# EAGLE board vr61 (EAGLE 9.6.2), part 1 of 2
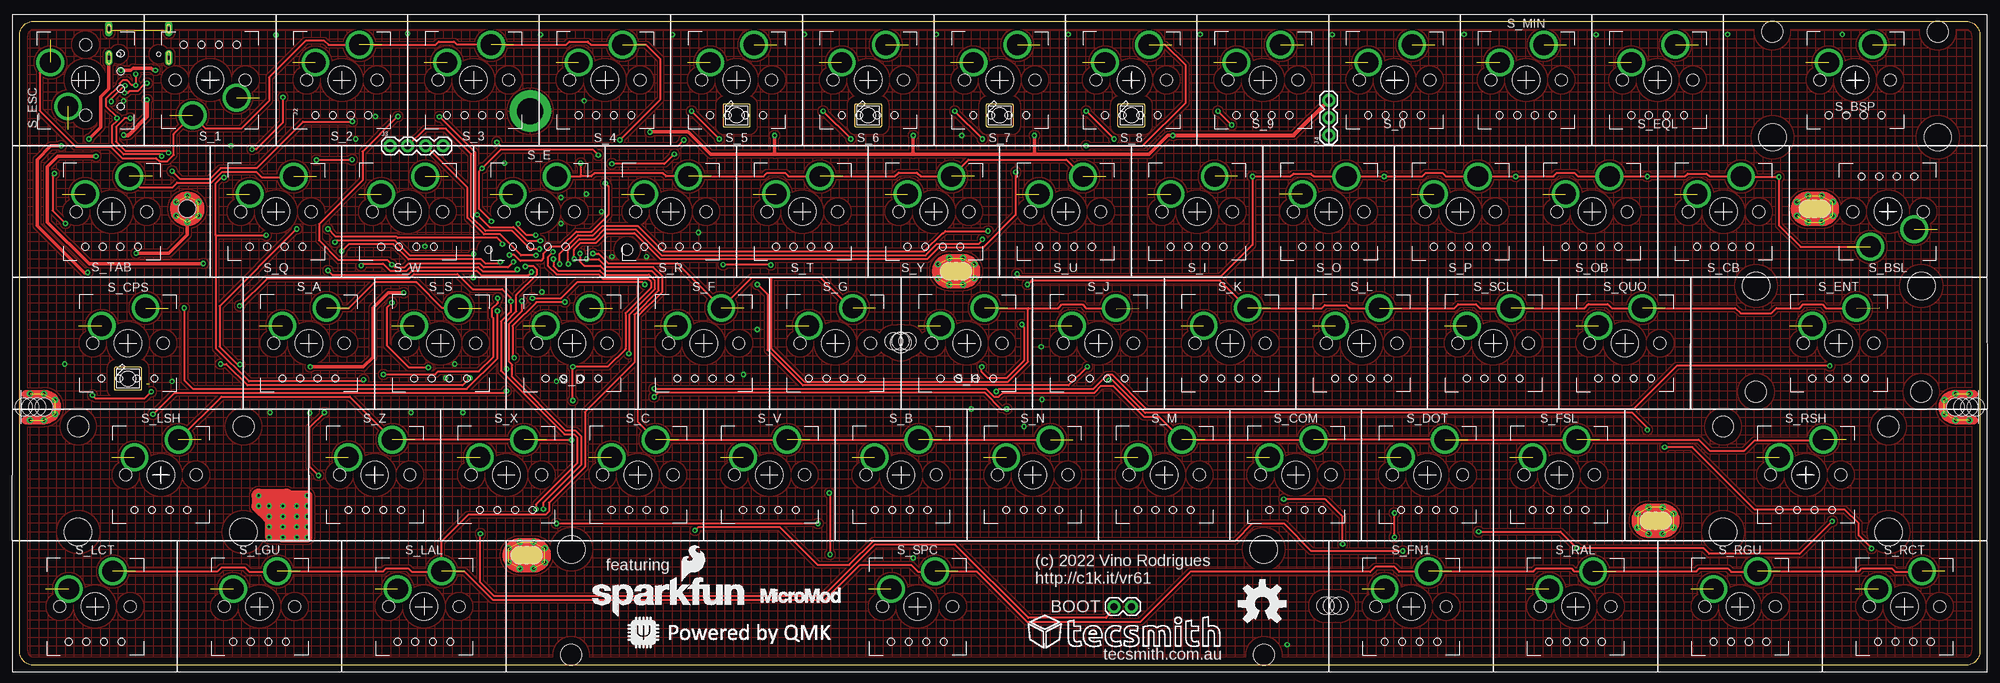
[diagram p0: board, top side]
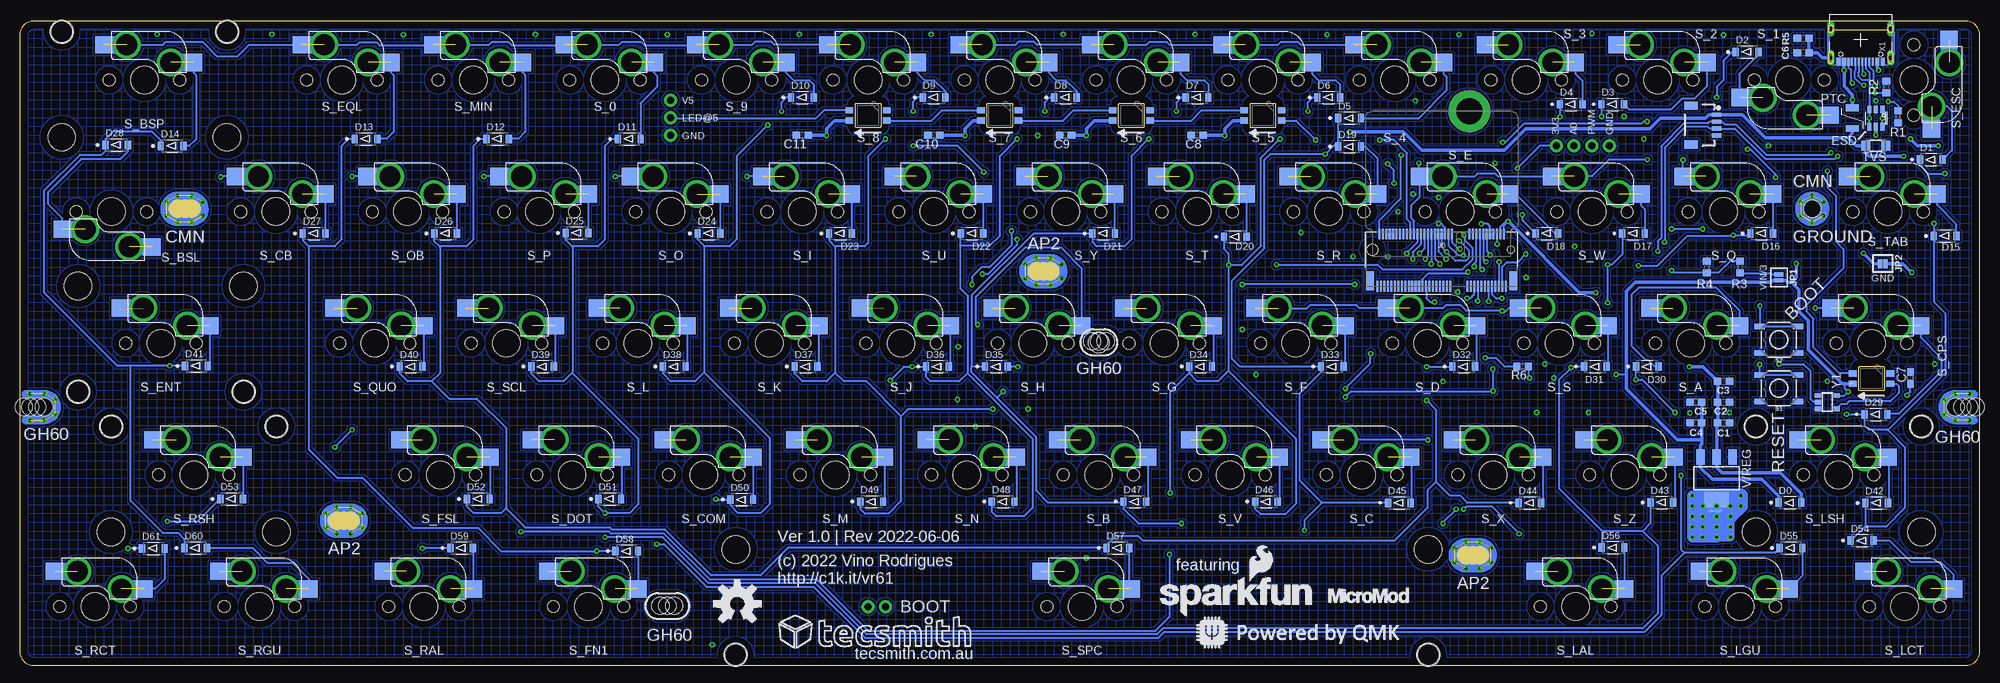
[diagram p1: board, bottom side, seen from below]

Size 283 x 93 mm. Coordinates in mm from the lower left corner, seen from the top.
Outline: 283,91 283,2 arc-90 281,0 2,0 arc-90 0,2 0,91 arc-90 2,93 281,93 arc-90 283,91
Copper layers (1*16): Top 0.035mm / dielectric 1.5mm / Bottom 0.035mm
Design rules "default *": minimum track width 10mil, minimum drill 0.35mm, track to track 10mil, track to pad 10mil, pad to pad 10mil, via to via 10mil, smd to smd 10mil, copper to edge 40mil, drill to drill 10mil, minimum pad ring 10mil, minimum via ring 8mil, stop-mask expansion 4mil, vias tented up to drill 0mil, thermal gap 10mil
Net classes: 0 default: width 0 mm, drill 0 mm
Holes 3 mm at 127.2,46.6
Holes 2.5 mm at 24.2,65.9 259.05,65.9 127.2,46.8 1.5,37.3 281.5,37.3 189.5,8.6 135.2,56.9 73.2,15.9 236.2,20.9 128.2,46.8 126.2,46.8 188.5,8.6 190.5,8.6

## Footprints (pad centres in the part's own frame; a part is rotated, then mirrored left to right if it is on the bottom)
MX-STABS-200U = hole 3.988: -11.938,8.255; 11.938,8.255 | hole 3.048: -11.938,-6.985; 11.938,-6.985
MX-STABS-625U = hole 3.988: -50,8.255; 50,8.255 | hole 3.048: -50,-6.985; 50,-6.985
0603 = smd 1.1 x 1: 1 -0.85,0; 2 0.85,0
C0603 = smd 1.1 x 1: 1 -0.85,0; 2 0.85,0
SOD-123 = smd 0.914 x 1.219: A 1.638,0; C -1.638,0
SOT-23-6L = smd 0.6 x 1.1: P$1 -0.95,-1.25; P$2 0,-1.25; P$3 0.95,-1.25; P$4 0.95,1.25; P$5 0,1.25; P$6 -0.95,1.25
STAND-OFF-REFLOW-M2.5 = drill 3.8 pad 6: 1 0,0
1X02 = drill 1.016 pad 1.88: 1 0,0; 2 2.54,0
1X04_1MM_RA = smd 0.6 x 1.35: 1 -1.5,0; 2 -0.5,0; 3 0.5,0; 4 1.5,0 | smd 1.2 x 2: NC1 2.8,-3.675; NC2 -2.8,-3.675
1X04 = drill 1.016 pad 1.88: 1 0,0; 2 2.54,0; 3 5.08,0; 4 7.62,0
1X03 = drill 1.016 pad 1.88: 1 0,0; 2 2.54,0; 3 5.08,0
M.2-CONNECTOR-E = smd 0.3 x 1.55: 1 9.25,-5.275; 2 9,2.275; 3 8.75,-5.275; 4 8.5,2.275; 5 8.25,-5.275; 6 8,2.275; 7 7.75,-5.275; 8 7.5,2.275; 9 7.25,-5.275; 10 7,2.275; 11 6.75,-5.275; 12 6.5,2.275; 13 6.25,-5.275; 14 6,2.275; 15 5.75,-5.275; 16 5.5,2.275; 17 5.25,-5.275; 18 5,2.275; 19 4.75,-5.275; 20 4.5,2.275; 21 4.25,-5.275; 22 4,2.275; 23 3.75,-5.275; 32 1.5,2.275; 33 1.25,-5.275; 34 1,2.275; 35 0.75,-5.275; 36 0.5,2.275; 37 0.25,-5.275; 38 0,2.275; 39 -0.25,-5.275; 40 -0.5,2.275; 41 -0.75,-5.275; 42 -1,2.275; 43 -1.25,-5.275; 44 -1.5,2.275; 45 -1.75,-5.275; 46 -2,2.275; 47 -2.25,-5.275; 48 -2.5,2.275; 49 -2.75,-5.275; 50 -3,2.275; 51 -3.25,-5.275; 52 -3.5,2.275; 53 -3.75,-5.275; 54 -4,2.275; 55 -4.25,-5.275; 56 -4.5,2.275; 57 -4.75,-5.275; 58 -5,2.275; 59 -5.25,-5.275; 60 -5.5,2.275; 61 -5.75,-5.275; 62 -6,2.275; 63 -6.25,-5.275; 64 -6.5,2.275; 65 -6.75,-5.275; 66 -7,2.275; 67 -7.25,-5.275; 68 -7.5,2.275; 69 -7.75,-5.275; 70 -8,2.275; 71 -8.25,-5.275; 72 -8.5,2.275; 73 -8.75,-5.275; 74 -9,2.275; 75 -9.25,-5.275 | smd 1.2 x 2.75: A1 10.35,-4.5; A2 -10.35,-4.5 | hole 1.1: 10,0 | hole 1.6: -10,0
SMT-JUMPER_2_NC_PASTE_NO-SILK = smd 0.635 x 1.27: 1 -0.406,0; 2 0.406,0
SMT-JUMPER_2_NO_NO-SILK = smd 0.635 x 1.27: 1 -0.406,0; 2 0.406,0
SK6812-E-MILL = smd 1.1 x 0.9 bottom: 1-VDD 2.7,-0.749; 2-DOUT 2.7,0.751; 3-GND -2.7,0.751; 4-DIN -2.7,-0.749
SOT223 = smd 1.219 x 2.235: 1 -2.311,-3.099; 2 0,-3.099; 3 2.311,-3.099 | smd 3.6 x 2.2: 4 0,3.099
SMD_PTC = smd 1 x 1.9: P$1 -1.5,0; P$2 1.5,0
R0603 = smd 1 x 1.1: 1 -0.85,0; 2 0.85,0
TACTILE_SWITCH_SMD_5.2MM = smd 1.524 x 0.762: 1 -2.794,1.905; 2 2.794,1.905; 3 -2.794,-1.905; 4 2.794,-1.905
MX-5-PIN-HOTSWAP-PAD = smd 2.55 x 2.5 bottom: P$1 -7.085,2.54; P$2 5.842,5.08 | drill 3 pad 3.75: P$3 -3.81,2.54; P$4 2.54,5.08 | hole 3.988: 0,0 | hole 1.75: -5.08,0; 5.08,0
MOUNTING-HOLE-WIDE = drill 0.4: P$2 -1,-1.9; P$3 -1,1.9; P$4 1,1.9; P$5 1,-1.9; P$7 2.6,-1; P$8 2.6,1; P$9 -2.6,1; P$10 -2.6,-1 | hole 2.5: -1,0; 1,0; 0,0
MOUNTING-HOLE = drill 0.4: P$2 0,-1.9; P$3 0,1.9; P$7 1.6,-1; P$8 1.6,1; P$9 -1.6,1; P$10 -1.6,-1 | hole 2.5: 0,0
MOUNTING-HOLE-VWIDE-C = drill 0.4: P$1 0,1.9; P$4 2,1.9; P$5 2,-1.9; P$6 0,-1.9; P$7 3.6,-1; P$8 3.6,1 | hole 2.5: 2,0; 0,0; 1,0; -0.9,0
SOD123FL-BI = smd 1.3 x 1.4: P$1 -1.45,0; P$2 1.45,0
TYPE-C-31-M-12 = smd 0.6 x 1.14: A1B12-GND -3.2,3.16; A4B9-VBUS -2.4,3.16; B1A12-GND 3.2,3.16; B4A9-VBUS 2.4,3.16 | smd 0.3 x 1.14: A5-CC1 -1.25,3.16; A6-DP1 -0.25,3.16; A7-DN1 0.25,3.16; A8-SBU1 1.25,3.16; B5-CC2 1.75,3.16; B6-DP2 0.75,3.16; B7-DN2 -0.75,3.16; B8-SBU2 -1.75,3.16 | drill 0.6 pad 1 long: M1 -4.32,2.59; M2 4.32,2.59; M3 -4.32,-1.59; M4 4.32,-1.59 | hole 0.6: 2.89,2.09; -2.89,2.09
SOT-23-5 = smd 0.69 x 0.99: 1 -0.95,-1.29; 2 0,-1.29; 3 0.95,-1.29; 4 0.95,1.3; 5 -0.95,1.3

## Placement (x,y rotation side)
B14  MX-STABS-200U  [MX-STABS-200U]  265,84.5 180 top
B41  MX-STABS-200U  [MX-STABS-200U]  262.62,46.5 0 top
B42  MX-STABS-200U  [MX-STABS-200U]  20.38,27.5 180 top
B53  MX-STABS-200U  [MX-STABS-200U]  257.88,27.5 180 top
B57  MX-STABS-625U  [MX-STABS-625U]  129.62,8.5 0 top
C1  100nF  [0603]  37,35 0 bottom
C2  22uF  [0603]  37,38 0 bottom
C3  4.7uF  [0603]  37,41 0 bottom
C4  100nF  [0603]  41,35 180 bottom
C5  22uF  [0603]  41,38 180 bottom
C6  4.7nF  [0603]  25.5,88.45 180 bottom
C7  100nF  [C0603]  10,41.5 90 bottom
C8  100nF  [C0603]  113,76.5 180 bottom
C9  100nF  [C0603]  132,76.5 180 bottom
C10  100nF  [C0603]  151,76.5 180 bottom
C11  100nF  [C0603]  170,76.5 180 bottom
D0  B5819W SL  [SOD-123]  27.4,23.5 0 bottom
D1  [SOD-123]  7,73 0 bottom
D2  [SOD-123]  33.6,88.55 0 bottom
D3  [SOD-123]  53,81 0 bottom
D4  [SOD-123]  59,81 0 bottom
D5  [SOD-123]  91,79 0 bottom
D6  [SOD-123]  94,82 0 bottom
D7  [SOD-123]  113,82 0 bottom
D8  [SOD-123]  132,82 0 bottom
D9  [SOD-123]  151,82 0 bottom
D10  [SOD-123]  170,82 0 bottom
D11  [SOD-123]  195,76 0 bottom
D12  [SOD-123]  214,76 0 bottom
D13  [SOD-123]  233,76 0 bottom
D14  [SOD-123]  261,75 0 bottom
D15  [SOD-123]  5,62 0 bottom
D16  [SOD-123]  31.5,62.38 0 bottom
D17  [SOD-123]  50,62.38 0 bottom
D18  [SOD-123]  62.5,62.38 0 bottom
D19  [SOD-123]  91,74.88 0 bottom
D20  [SOD-123]  107.5,61.88 0 bottom
D21  [SOD-123]  126.5,62.38 0 bottom
D22  [SOD-123]  145.5,62.38 0 bottom
D23  [SOD-123]  164.5,62.38 0 bottom
D24  [SOD-123]  183.5,62.38 0 bottom
D25  [SOD-123]  202.55,62.42 0 bottom
D26  [SOD-123]  221.5,62.38 0 bottom
D27  [SOD-123]  240.5,62.38 0 bottom
D28  [SOD-123]  269,75.12 0 bottom
D29  [SOD-123]  15,36.25 0 bottom
D30  [SOD-123]  48,43.12 0 bottom
D31  [SOD-123]  55.5,43.12 0 bottom
D32  [SOD-123]  74.5,43.12 0 bottom
D33  [SOD-123]  93.5,43.12 0 bottom
D34  [SOD-123]  112.5,43.12 0 bottom
D35  [SOD-123]  142,43.12 0 bottom
D36  [SOD-123]  150.5,43.12 0 bottom
D37  [SOD-123]  169.5,43.12 0 bottom
D38  [SOD-123]  188.5,43.12 0 bottom
D39  [SOD-123]  207.5,43.12 0 bottom
D40  [SOD-123]  226.5,43.12 0 bottom
D41  [SOD-123]  257.5,43.25 0 bottom
D42  [SOD-123]  14.9,23.45 0 bottom
D43  [SOD-123]  45.9,23.52 0 bottom
D44  [SOD-123]  64.95,23.48 0 bottom
D45  [SOD-123]  83.8,23.48 0 bottom
D46  [SOD-123]  103,23.62 0 bottom
D47  [SOD-123]  122,23.62 0 bottom
D48  [SOD-123]  141,23.62 0 bottom
D49  [SOD-123]  160,23.62 0 bottom
D50  [SOD-123]  178.75,23.93 0 bottom
D51  [SOD-123]  197.8,24.02 0 bottom
D52  [SOD-123]  216.8,24.02 0 bottom
D53  [SOD-123]  252.4,24.05 0 bottom
D54  [SOD-123]  17,18 0 bottom
D55  [SOD-123]  27.25,16.95 0 bottom
D56  [SOD-123]  52.95,17 0 bottom
D57  [SOD-123]  124.45,16.95 0 bottom
D58  [SOD-123]  195.35,16.5 0 bottom
D59  [SOD-123]  219.2,16.95 0 bottom
D60  [SOD-123]  257.6,16.95 0 bottom
D61  [SOD-123]  263.7,16.9 0 bottom
ESD  ESD_SRV05-4  [SOT-23-6L]  15,79 180 bottom
H5  STAND-OFF-REFLOW2.5MM_TALL  [STAND-OFF-REFLOW-M2.5]  73.7,80 0 top
J1  [1X02]  158,8.5 0 top
J2  SM04B-SRSS-TB(LF)(SN)  [1X04_1MM_RA]  38,78 270 bottom
J3  [1X04]  53.5,75 0 top
J4  [1X03]  189,76.5 90 top
J6  MICROMOD-2222-C  [M.2-CONNECTOR-E]  77.7,60 0 bottom
JP1  OPT  [SMT-JUMPER_2_NC_PASTE_NO-SILK]  29,56 270 bottom
JP2  G-OPT  [SMT-JUMPER_2_NO_NO-SILK]  14,58 180 bottom
LED-5  SK6812-E-REVERSE  [SK6812-E-MILL]  103.5,79.4 0 top
LED-6  SK6812-E-REVERSE  [SK6812-E-MILL]  122.5,79.4 0 top
LED-7  SK6812-E-REVERSE  [SK6812-E-MILL]  141.5,79.4 0 top
LED-8  SK6812-E-REVERSE  [SK6812-E-MILL]  160.5,79.4 0 top
LED-CL  SK6812-E-REVERSE  [SK6812-E-MILL]  15.62,41.4 0 top
LM1117  AMS1117-3.3  [SOT223]  38,27 180 bottom
LOGO1  OSHW-LOGOL  [OSHW-LOGO-L]  179.4,8.9 0 top
LOGO2  OSHW-LOGOL  [OSHW-LOGO-L]  179.4,8.9 0 bottom
PTC  PTC_ASMD1206-150  [SMD_PTC]  18.4,79 270 bottom
R1  5.1K  [R0603]  11.8,79.2 270 bottom
R2  5.1K  [R0603]  13.5,83.5 90 bottom
R3  150K  [R0603]  34.6,57.5 270 bottom
R4  75K  [R0603]  39.4,57.5 270 bottom
R5  1000K  [0603]  25.5,90.5 0 bottom
R6  220  [R0603]  66,43.15 180 bottom
S1  Reset  [TACTILE_SWITCH_SMD_5.2MM]  29,40 180 bottom
S2  BOOT  [TACTILE_SWITCH_SMD_5.2MM]  29,47 180 bottom
S_0  MX-5-PIN-HOTSWAP-PAD  [MX-5-PIN-HOTSWAP-PAD]  198.5,84.5 0 top
S_1  MX-5-PIN-HOTSWAP-PAD  [MX-5-PIN-HOTSWAP-PAD]  27.5,84.5 180 top
S_2  MX-5-PIN-HOTSWAP-PAD  [MX-5-PIN-HOTSWAP-PAD]  46.5,84.5 0 top
S_3  MX-5-PIN-HOTSWAP-PAD  [MX-5-PIN-HOTSWAP-PAD]  65.5,84.5 0 top
S_4  MX-5-PIN-HOTSWAP-PAD  [MX-5-PIN-HOTSWAP-PAD]  84.5,84.5 0 top
S_5  MX-5-PIN-HOTSWAP-PAD  [MX-5-PIN-HOTSWAP-PAD]  103.5,84.5 0 top
S_6  MX-5-PIN-HOTSWAP-PAD  [MX-5-PIN-HOTSWAP-PAD]  122.5,84.5 0 top
S_7  MX-5-PIN-HOTSWAP-PAD  [MX-5-PIN-HOTSWAP-PAD]  141.5,84.5 0 top
S_8  MX-5-PIN-HOTSWAP-PAD  [MX-5-PIN-HOTSWAP-PAD]  160.5,84.5 0 top
S_9  MX-5-PIN-HOTSWAP-PAD  [MX-5-PIN-HOTSWAP-PAD]  179.5,84.5 0 top
S_A  MX-5-PIN-HOTSWAP-PAD  [MX-5-PIN-HOTSWAP-PAD]  41.75,46.5 0 top
S_B  MX-5-PIN-HOTSWAP-PAD  [MX-5-PIN-HOTSWAP-PAD]  127.25,27.5 0 top
S_BSL  MX-5-PIN-HOTSWAP-PAD  [MX-5-PIN-HOTSWAP-PAD]  269.75,65.5 180 top
S_BSP  MX-5-PIN-HOTSWAP-PAD  [MX-5-PIN-HOTSWAP-PAD]  265,84.5 0 top
S_C  MX-5-PIN-HOTSWAP-PAD  [MX-5-PIN-HOTSWAP-PAD]  89.25,27.5 0 top
S_CB  MX-5-PIN-HOTSWAP-PAD  [MX-5-PIN-HOTSWAP-PAD]  246,65.5 0 top
S_COM  MX-5-PIN-HOTSWAP-PAD  [MX-5-PIN-HOTSWAP-PAD]  184.25,27.5 0 top
S_CPS  MX-5-PIN-HOTSWAP-PAD  [MX-5-PIN-HOTSWAP-PAD]  15.62,46.5 0 top
S_D  MX-5-PIN-HOTSWAP-PAD  [MX-5-PIN-HOTSWAP-PAD]  79.75,46.5 0 top
S_DOT  MX-5-PIN-HOTSWAP-PAD  [MX-5-PIN-HOTSWAP-PAD]  203.25,27.5 0 top
S_E  MX-5-PIN-HOTSWAP-PAD  [MX-5-PIN-HOTSWAP-PAD]  75,65.5 0 top
S_ENT  MX-5-PIN-HOTSWAP-PAD  [MX-5-PIN-HOTSWAP-PAD]  262.62,46.5 0 top
S_EQL  MX-5-PIN-HOTSWAP-PAD  [MX-5-PIN-HOTSWAP-PAD]  236.5,84.5 0 top
S_ESC  MX-5-PIN-HOTSWAP-PAD  [MX-5-PIN-HOTSWAP-PAD]  9.5,84.5 90 top
S_F  MX-5-PIN-HOTSWAP-PAD  [MX-5-PIN-HOTSWAP-PAD]  98.75,46.5 0 top
S_FN1  MX-5-PIN-HOTSWAP-PAD  [MX-5-PIN-HOTSWAP-PAD]  200.88,8.5 0 top
S_FSL  MX-5-PIN-HOTSWAP-PAD  [MX-5-PIN-HOTSWAP-PAD]  222.25,27.5 0 top
S_G  MX-5-PIN-HOTSWAP-PAD  [MX-5-PIN-HOTSWAP-PAD]  117.75,46.5 0 top
S_H  MX-5-PIN-HOTSWAP-PAD  [MX-5-PIN-HOTSWAP-PAD]  136.75,46.5 0 top
S_I  MX-5-PIN-HOTSWAP-PAD  [MX-5-PIN-HOTSWAP-PAD]  170,65.5 0 top
S_J  MX-5-PIN-HOTSWAP-PAD  [MX-5-PIN-HOTSWAP-PAD]  155.75,46.5 0 top
S_K  MX-5-PIN-HOTSWAP-PAD  [MX-5-PIN-HOTSWAP-PAD]  174.75,46.5 0 top
S_L  MX-5-PIN-HOTSWAP-PAD  [MX-5-PIN-HOTSWAP-PAD]  193.75,46.5 0 top
S_LAL  MX-5-PIN-HOTSWAP-PAD  [MX-5-PIN-HOTSWAP-PAD]  58.38,8.5 0 top
S_LCT  MX-5-PIN-HOTSWAP-PAD  [MX-5-PIN-HOTSWAP-PAD]  10.88,8.5 0 top
S_LGU  MX-5-PIN-HOTSWAP-PAD  [MX-5-PIN-HOTSWAP-PAD]  34.62,8.5 0 top
S_LSH  MX-5-PIN-HOTSWAP-PAD  [MX-5-PIN-HOTSWAP-PAD]  20.38,27.5 0 top
S_M  MX-5-PIN-HOTSWAP-PAD  [MX-5-PIN-HOTSWAP-PAD]  165.25,27.5 0 top
S_MIN  MX-5-PIN-HOTSWAP-PAD  [MX-5-PIN-HOTSWAP-PAD]  217.5,84.5 0 top
S_N  MX-5-PIN-HOTSWAP-PAD  [MX-5-PIN-HOTSWAP-PAD]  146.25,27.5 0 top
S_O  MX-5-PIN-HOTSWAP-PAD  [MX-5-PIN-HOTSWAP-PAD]  189,65.5 0 top
S_OB  MX-5-PIN-HOTSWAP-PAD  [MX-5-PIN-HOTSWAP-PAD]  227,65.5 0 top
S_P  MX-5-PIN-HOTSWAP-PAD  [MX-5-PIN-HOTSWAP-PAD]  208,65.5 0 top
S_Q  MX-5-PIN-HOTSWAP-PAD  [MX-5-PIN-HOTSWAP-PAD]  37,65.5 0 top
S_QUO  MX-5-PIN-HOTSWAP-PAD  [MX-5-PIN-HOTSWAP-PAD]  231.75,46.5 0 top
S_R  MX-5-PIN-HOTSWAP-PAD  [MX-5-PIN-HOTSWAP-PAD]  94,65.5 0 top
S_RAL  MX-5-PIN-HOTSWAP-PAD  [MX-5-PIN-HOTSWAP-PAD]  224.62,8.5 0 top
S_RCT  MX-5-PIN-HOTSWAP-PAD  [MX-5-PIN-HOTSWAP-PAD]  272.12,8.5 0 top
S_RGU  MX-5-PIN-HOTSWAP-PAD  [MX-5-PIN-HOTSWAP-PAD]  248.38,8.5 0 top
S_RSH  MX-5-PIN-HOTSWAP-PAD  [MX-5-PIN-HOTSWAP-PAD]  257.88,27.5 0 top
S_S  MX-5-PIN-HOTSWAP-PAD  [MX-5-PIN-HOTSWAP-PAD]  60.75,46.5 0 top
S_SCL  MX-5-PIN-HOTSWAP-PAD  [MX-5-PIN-HOTSWAP-PAD]  212.75,46.5 0 top
S_SPC  MX-5-PIN-HOTSWAP-PAD  [MX-5-PIN-HOTSWAP-PAD]  129.62,8.5 0 top
S_T  MX-5-PIN-HOTSWAP-PAD  [MX-5-PIN-HOTSWAP-PAD]  113,65.5 0 top
S_TAB  MX-5-PIN-HOTSWAP-PAD  [MX-5-PIN-HOTSWAP-PAD]  13.25,65.5 0 top
S_U  MX-5-PIN-HOTSWAP-PAD  [MX-5-PIN-HOTSWAP-PAD]  151,65.5 0 top
S_V  MX-5-PIN-HOTSWAP-PAD  [MX-5-PIN-HOTSWAP-PAD]  108.25,27.5 0 top
S_W  MX-5-PIN-HOTSWAP-PAD  [MX-5-PIN-HOTSWAP-PAD]  56,65.5 0 top
S_X  MX-5-PIN-HOTSWAP-PAD  [MX-5-PIN-HOTSWAP-PAD]  70.25,27.5 0 top
S_Y  MX-5-PIN-HOTSWAP-PAD  [MX-5-PIN-HOTSWAP-PAD]  132,65.5 0 top
S_Z  MX-5-PIN-HOTSWAP-PAD  [MX-5-PIN-HOTSWAP-PAD]  51.25,27.5 0 top
SA1  MOUNTING-HOLE-WIDE  [MOUNTING-HOLE-WIDE]  73.2,15.9 0 top
SA2  MOUNTING-HOLE-WIDE  [MOUNTING-HOLE-WIDE]  135.2,56.9 0 top
SA3  MOUNTING-HOLE-WIDE  [MOUNTING-HOLE-WIDE]  236.2,20.9 0 top
SC1  MOUNTING-HOLE  [MOUNTING-HOLE]  24.2,65.9 0 top
SC2  MOUNTING-HOLE-WIDE  [MOUNTING-HOLE-WIDE]  259.2,65.9 0 top
SG1  MOUNTING-HOLE-VWIDEEDGE-CUT  [MOUNTING-HOLE-VWIDE-C]  1.5,37.3 0 top
SG4  MOUNTING-HOLE-VWIDEEDGE-CUT  [MOUNTING-HOLE-VWIDE-C]  281.5,37.3 180 top
TVS  TVS_SMF9.0CA  [SOD123FL-BI]  15,75 0 bottom
U$3  MICROMOD-LOGO  [MICROMOD-LOGO]  107,9 0 top
U$5  SPARKFUN_LOGO0.2  [SFE_LOGO_NAME_FLAME_.2]  82,7 0 top
U$6  QMK_LOGO  [QMK_LOGO]  87.7,2.4 0 top
U$7  TECSMITH-LOGOLONG  [TECSMITH-NAME]  171,5 0 bottom
U$8  TECSMITH-LOGOLONG  [TECSMITH-NAME]  148,5 0 top
U$10  SPARKFUN_LOGO0.2  [SFE_LOGO_NAME_FLAME_.2]  119,7 0 bottom
U$12  QMK_LOGO  [QMK_LOGO]  113.2,2.4 0 bottom
U$13  MICROMOD-LOGO  [MICROMOD-LOGO]  94,9 0 bottom
X1  TYPE-C-31-M-12  [TYPE-C-31-M-12]  17.2,90.3 180 bottom
Y1  74AHCT1G125  [SOT-23-5]  22,38 270 bottom
Z1  MX-FPRINT-100U19  [MX-FPRINT-1900-100U]  8.5,84.5 90 top
Z2  MX-FPRINT-100U19  [MX-FPRINT-1900-100U]  27.5,84.5 90 top
Z3  MX-FPRINT-100U19  [MX-FPRINT-1900-100U]  46.5,84.5 0 top
Z4  MX-FPRINT-100U19  [MX-FPRINT-1900-100U]  65.5,84.5 0 top
Z5  MX-FPRINT-100U19  [MX-FPRINT-1900-100U]  84.5,84.5 0 top
Z6  MX-FPRINT-100U19  [MX-FPRINT-1900-100U]  103.5,84.5 0 top
Z7  MX-FPRINT-100U19  [MX-FPRINT-1900-100U]  122.5,84.5 0 top
Z8  MX-FPRINT-100U19  [MX-FPRINT-1900-100U]  141.5,84.5 0 top
Z9  MX-FPRINT-100U19  [MX-FPRINT-1900-100U]  160.5,84.5 90 top
Z10  MX-FPRINT-100U19  [MX-FPRINT-1900-100U]  179.5,84.5 0 top
Z11  MX-FPRINT-100U19  [MX-FPRINT-1900-100U]  198.5,84.5 270 top
Z12  MX-FPRINT-100U19  [MX-FPRINT-1900-100U]  217.5,84.5 0 top
Z13  MX-FPRINT-100U19  [MX-FPRINT-1900-100U]  236.5,84.5 0 top
Z14  MX-FPRINT-200U19  [MX-FPRINT-1900-200U]  265,84.5 0 top
Z15  MX-FPRINT-150U19  [MX-FPRINT-1900-150U]  13.25,65.5 0 top
Z16  MX-FPRINT-100U19  [MX-FPRINT-1900-100U]  37,65.5 0 top
Z17  MX-FPRINT-100U19  [MX-FPRINT-1900-100U]  56,65.5 0 top
Z18  MX-FPRINT-100U19  [MX-FPRINT-1900-100U]  75,65.5 90 top
Z19  MX-FPRINT-100U19  [MX-FPRINT-1900-100U]  94,65.5 0 top
Z20  MX-FPRINT-100U19  [MX-FPRINT-1900-100U]  113,65.5 0 top
Z21  MX-FPRINT-100U19  [MX-FPRINT-1900-100U]  132,65.5 0 top
Z22  MX-FPRINT-100U19  [MX-FPRINT-1900-100U]  151,65.5 0 top
Z23  MX-FPRINT-100U19  [MX-FPRINT-1900-100U]  170,65.5 0 top
Z24  MX-FPRINT-100U19  [MX-FPRINT-1900-100U]  189,65.5 0 top
Z25  MX-FPRINT-100U19  [MX-FPRINT-1900-100U]  208,65.5 0 top
Z26  MX-FPRINT-100U19  [MX-FPRINT-1900-100U]  227,65.5 0 top
Z27  MX-FPRINT-100U19  [MX-FPRINT-1900-100U]  246,65.5 0 top
Z28  MX-FPRINT-150U19  [MX-FPRINT-1900-150U]  269.75,65.5 0 top
Z29  MX-FPRINT-175U19  [MX-FPRINT-1900-175U]  15.62,46.5 0 top
Z30  MX-FPRINT-100U19  [MX-FPRINT-1900-100U]  41.75,46.5 0 top
Z31  MX-FPRINT-100U19  [MX-FPRINT-1900-100U]  60.75,46.5 0 top
Z32  MX-FPRINT-100U19  [MX-FPRINT-1900-100U]  79.75,46.5 0 top
Z33  MX-FPRINT-100U19  [MX-FPRINT-1900-100U]  98.75,46.5 0 top
Z34  MX-FPRINT-100U19  [MX-FPRINT-1900-100U]  117.75,46.5 0 top
Z35  MX-FPRINT-100U19  [MX-FPRINT-1900-100U]  136.75,46.5 0 top
Z36  MX-FPRINT-100U19  [MX-FPRINT-1900-100U]  155.75,46.5 0 top
Z37  MX-FPRINT-100U19  [MX-FPRINT-1900-100U]  174.75,46.5 0 top
Z38  MX-FPRINT-100U19  [MX-FPRINT-1900-100U]  193.75,46.5 0 top
Z39  MX-FPRINT-100U19  [MX-FPRINT-1900-100U]  212.75,46.5 0 top
Z40  MX-FPRINT-100U19  [MX-FPRINT-1900-100U]  231.75,46.5 0 top
Z41  MX-FPRINT-225U19  [MX-FPRINT-1900-225U]  262.62,46.5 0 top
Z42  MX-FPRINT-225U19  [MX-FPRINT-1900-225U]  20.38,27.5 0 top
Z43  MX-FPRINT-100U19  [MX-FPRINT-1900-100U]  51.25,27.5 90 top
Z44  MX-FPRINT-100U19  [MX-FPRINT-1900-100U]  70.25,27.5 0 top
Z45  MX-FPRINT-100U19  [MX-FPRINT-1900-100U]  89.25,27.5 0 top
Z46  MX-FPRINT-100U19  [MX-FPRINT-1900-100U]  108.25,27.5 0 top
Z47  MX-FPRINT-100U19  [MX-FPRINT-1900-100U]  127.25,27.5 0 top
Z48  MX-FPRINT-100U19  [MX-FPRINT-1900-100U]  146.25,27.5 0 top
Z49  MX-FPRINT-100U19  [MX-FPRINT-1900-100U]  165.25,27.5 0 top
Z50  MX-FPRINT-100U19  [MX-FPRINT-1900-100U]  184.25,27.5 0 top
Z51  MX-FPRINT-100U19  [MX-FPRINT-1900-100U]  203.25,27.5 0 top
Z52  MX-FPRINT-100U19  [MX-FPRINT-1900-100U]  222.25,27.5 0 top
Z53  MX-FPRINT-275U19  [MX-FPRINT-1900-275U]  257.88,27.5 0 top
Z54  MX-FPRINT-125U19  [MX-FPRINT-1900-125U]  10.88,8.5 0 top
Z55  MX-FPRINT-125U19  [MX-FPRINT-1900-125U]  34.62,8.5 0 top
Z56  MX-FPRINT-125U19  [MX-FPRINT-1900-125U]  58.38,8.5 0 top
Z57  MX-FPRINT-625U19  [MX-FPRINT-1900-625U]  129.62,8.5 0 top
Z58  MX-FPRINT-125U19  [MX-FPRINT-1900-125U]  200.88,8.5 0 top
Z59  MX-FPRINT-125U19  [MX-FPRINT-1900-125U]  224.62,8.5 0 top
Z60  MX-FPRINT-125U19  [MX-FPRINT-1900-125U]  248.38,8.5 0 top
Z61  MX-FPRINT-125U19  [MX-FPRINT-1900-125U]  272.12,8.5 0 top

## Library data of the parts
B14 B41 B42 B53 B57 ESD LED-5-LED-8 LED-CL PTC S_0 S_1-S_9 S_A S_B S_BSL S_BSP S_C S_CB S_COM S_CPS S_D S_DOT S_E S_ENT S_EQL S_ESC S_F S_FN1 S_FSL S_G S_H S_I S_J S_K S_L S_LAL S_LCT S_LGU S_LSH S_M S_MIN S_N S_O S_OB S_P S_Q S_QUO S_R S_RAL S_RCT S_RGU S_RSH S_S S_SCL S_SPC S_T S_TAB S_U S_V S_W S_X S_Y S_Z SA1-SA3 SC1 SC2 SG1 SG4 TVS X1 Y1 Z1-Z61 = ts_keyboards
C1 C4 C6 = SparkFun-Capacitors; PROD_ID: CAP-08604
C2 C5 = SparkFun-Capacitors; PROD_ID: CAP-07822
C3 = SparkFun-Capacitors; PROD_ID: CAP-07886
C7-C11 = rcl; SPICEPREFIX: C
D0 D1-D61 = jlcpcb_basic_parts
H5 = SparkFun-Hardware; PROD_ID: HW-14899
J1 J4 = SparkFun-Connectors
J2 = __untitled
J3 = SparkFun-Connectors; PROD_ID: CONN-09696
J6 = SparkFun-MicroMod; PROD_ID: CONN-14877
JP1 JP2 = SparkFun-Jumpers
LM1117 = SparkFun-IC-Power; PROD_ID: VREG-08170
LOGO1 LOGO2 U$3 U$5-U$8 U$10 U$12 U$13 = random_logos
R1-R4 R6 = rcl; SPICEPREFIX: R
R5 = SparkFun-Resistors; PROD_ID: RES-09737
S1 S2 = SparkFun-Switches; PROD_ID: SWCH-14139

## Nets
!BOOT: J1.1 J6.11 S2.3 S2.4
!RESET: J6.6 S1.3 S1.4
A0: J3.3 J6.34
CC1: R1.1 X1.A5-CC1
CC2: R2.1 X1.B5-CC2
D+: ESD.P$1 ESD.P$6 J2.3 J6.3 X1.A6-DP1 X1.B6-DP2
D-: ESD.P$3 ESD.P$4 J2.2 J6.5 X1.A7-DN1 X1.B7-DN2
GND: C1.2 C2.2 C3.2 C4.2 C5.2 C6.2 C7.2 C8.2 C9.2 C10.2 C11.2 ESD.P$2 H5.1 J1.2 J2.4 J3.1 J4.1 J6.1 J6.7 J6.33 J6.36 J6.39 J6.45 J6.75 LED-5.3-GND LED-6.3-GND LED-7.3-GND LED-8.3-GND LED-CL.3-GND LM1117.1 R1.2 R2.2 R4.1 R5.1 S1.1 S1.2 S2.1 S2.2 TVS.P$2 X1.A1B12-GND X1.B1A12-GND Y1.1 Y1.3
GROUND: C6.1 JP2.1 R5.2 X1.M1 X1.M2 X1.M3 X1.M4
LED: J6.47 R6.2
LED1ST: R6.1 Y1.2
MX0: D1.C D9.C D15.C D23.C D29.C D37.C D42.C D49.C D54.C J6.18
MX1: D2.C D10.C D16.C D24.C D30.C D38.C D50.C D55.C J6.16
MX2: D3.C D11.C D17.C D25.C D31.C D39.C D43.C D51.C D56.C J6.14
MX3: D4.C D12.C D18.C D26.C D32.C D40.C D44.C D52.C D57.C J6.38
MX4: D5.C D13.C D19.C D27.C D33.C D45.C D58.C J6.12
MX5: D6.C D20.C D34.C D46.C D53.C D59.C J6.10
MX6: D7.C D14.C D21.C D28.C D35.C D41.C D47.C D60.C J6.17
MX7: D8.C D22.C D36.C D48.C D61.C J6.19
MY0: J6.56 S_1.P$2 S_1.P$4 S_2.P$2 S_2.P$4 S_3.P$2 S_3.P$4 S_4.P$2 S_4.P$4 S_5.P$2 S_5.P$4 S_6.P$2 S_6.P$4 S_7.P$2 S_7.P$4 S_ESC.P$2 S_ESC.P$4
MY1: J6.54 S_E.P$2 S_E.P$4 S_Q.P$2 S_Q.P$4 S_R.P$2 S_R.P$4 S_T.P$2 S_T.P$4 S_TAB.P$2 S_TAB.P$4 S_U.P$2 S_U.P$4 S_W.P$2 S_W.P$4 S_Y.P$2 S_Y.P$4
MY2: J6.52 S_A.P$2 S_A.P$4 S_CPS.P$2 S_CPS.P$4 S_D.P$2 S_D.P$4 S_F.P$2 S_F.P$4 S_G.P$2 S_G.P$4 S_H.P$2 S_H.P$4 S_J.P$2 S_J.P$4 S_S.P$2 S_S.P$4
MY3: J6.50 S_B.P$2 S_B.P$4 S_C.P$2 S_C.P$4 S_LSH.P$2 S_LSH.P$4 S_N.P$2 S_N.P$4 S_V.P$2 S_V.P$4 S_X.P$2 S_X.P$4 S_Z.P$2 S_Z.P$4
MY4: J6.48 S_FN1.P$2 S_FN1.P$4 S_LAL.P$2 S_LAL.P$4 S_LCT.P$2 S_LCT.P$4 S_LGU.P$2 S_LGU.P$4 S_RAL.P$2 S_RAL.P$4 S_RCT.P$2 S_RCT.P$4 S_RGU.P$2 S_RGU.P$4 S_SPC.P$2 S_SPC.P$4
MY5: J6.46 S_0.P$2 S_0.P$4 S_8.P$2 S_8.P$4 S_9.P$2 S_9.P$4 S_BSP.P$2 S_BSP.P$4 S_EQL.P$2 S_EQL.P$4 S_MIN.P$2 S_MIN.P$4
MY6: J6.44 S_BSL.P$2 S_BSL.P$4 S_CB.P$2 S_CB.P$4 S_I.P$2 S_I.P$4 S_O.P$2 S_O.P$4 S_OB.P$2 S_OB.P$4 S_P.P$2 S_P.P$4
MY7: J6.42 S_ENT.P$2 S_ENT.P$4 S_K.P$2 S_K.P$4 S_L.P$2 S_L.P$4 S_QUO.P$2 S_QUO.P$4 S_SCL.P$2 S_SCL.P$4
MY8: J6.40 S_COM.P$2 S_COM.P$4 S_DOT.P$2 S_DOT.P$4 S_FSL.P$2 S_FSL.P$4 S_M.P$2 S_M.P$4 S_RSH.P$2 S_RSH.P$4
N$1: D1.A S_ESC.P$1 S_ESC.P$3
N$2: D2.A S_1.P$1 S_1.P$3
N$3: D3.A S_2.P$1 S_2.P$3
N$4: D4.A S_3.P$1 S_3.P$3
N$5: D5.A S_4.P$1 S_4.P$3
N$6: D6.A S_5.P$1 S_5.P$3
N$7: D7.A S_6.P$1 S_6.P$3
N$8: D8.A S_7.P$1 S_7.P$3
N$9: D9.A S_8.P$1 S_8.P$3
N$10: D10.A S_9.P$1 S_9.P$3
N$11: D11.A S_0.P$1 S_0.P$3
N$12: D12.A S_MIN.P$1 S_MIN.P$3
N$13: D13.A S_EQL.P$1 S_EQL.P$3
N$14: D14.A S_BSP.P$1 S_BSP.P$3
N$15: D15.A S_TAB.P$1 S_TAB.P$3
N$16: D16.A S_Q.P$1 S_Q.P$3
N$17: D17.A S_W.P$1 S_W.P$3
N$18: D18.A S_E.P$1 S_E.P$3
N$19: D19.A S_R.P$1 S_R.P$3
N$20: D20.A S_T.P$1 S_T.P$3
N$21: D21.A S_Y.P$1 S_Y.P$3
N$22: D22.A S_U.P$1 S_U.P$3
N$23: D23.A S_I.P$1 S_I.P$3
N$24: D24.A S_O.P$1 S_O.P$3
N$25: D25.A S_P.P$1 S_P.P$3
N$26: D26.A S_OB.P$1 S_OB.P$3
N$27: D27.A S_CB.P$1 S_CB.P$3
N$28: D28.A S_BSL.P$1 S_BSL.P$3
N$29: LED-5.4-DIN LED-CL.2-DOUT
N$30: D30.A S_A.P$1 S_A.P$3
N$31: D31.A S_S.P$1 S_S.P$3
N$32: D32.A S_D.P$1 S_D.P$3
N$33: D33.A S_F.P$1 S_F.P$3
N$34: D34.A S_G.P$1 S_G.P$3
N$35: D35.A S_H.P$1 S_H.P$3
N$36: D36.A S_J.P$1 S_J.P$3
N$37: D37.A S_K.P$1 S_K.P$3
N$38: D38.A S_L.P$1 S_L.P$3
N$39: D39.A S_SCL.P$1 S_SCL.P$3
N$40: D40.A S_QUO.P$1 S_QUO.P$3
N$41: D41.A S_ENT.P$1 S_ENT.P$3
N$42: D42.A S_LSH.P$1 S_LSH.P$3
N$43: D43.A S_Z.P$1 S_Z.P$3
N$44: D44.A S_X.P$1 S_X.P$3
N$45: D45.A S_C.P$1 S_C.P$3
N$46: D46.A S_V.P$1 S_V.P$3
N$47: D47.A S_B.P$1 S_B.P$3
N$48: D48.A S_N.P$1 S_N.P$3
N$49: D49.A S_M.P$1 S_M.P$3
N$50: D50.A S_COM.P$1 S_COM.P$3
N$51: D51.A S_DOT.P$1 S_DOT.P$3
N$52: D52.A S_FSL.P$1 S_FSL.P$3
N$53: D53.A S_RSH.P$1 S_RSH.P$3
N$54: D54.A S_LCT.P$1 S_LCT.P$3
N$55: D55.A S_LGU.P$1 S_LGU.P$3
N$56: D56.A S_LAL.P$1 S_LAL.P$3
N$57: D57.A S_SPC.P$1 S_SPC.P$3
N$58: D58.A S_FN1.P$1 S_FN1.P$3
N$59: D59.A S_RAL.P$1 S_RAL.P$3
N$60: D60.A S_RGU.P$1 S_RGU.P$3
N$61: D61.A S_RCT.P$1 S_RCT.P$3
N$62: D29.A S_CPS.P$1 S_CPS.P$3
N$63: LED-5.2-DOUT LED-6.4-DIN
N$64: LED-6.2-DOUT LED-7.4-DIN
N$65: LED-7.2-DOUT LED-8.4-DIN
N$68: JP1.1 R3.2
N$70: LED-CL.4-DIN Y1.4
N$72: J4.2 LED-8.2-DOUT
PWM: J3.2 J6.32
SA1: SA1.P$2 SA1.P$3 SA1.P$4 SA1.P$5 SA1.P$7 SA1.P$8 SA1.P$9 SA1.P$10
SA2: SA2.P$2 SA2.P$3 SA2.P$4 SA2.P$5 SA2.P$7 SA2.P$8 SA2.P$9 SA2.P$10
SA3: SA3.P$2 SA3.P$3 SA3.P$4 SA3.P$5 SA3.P$7 SA3.P$8 SA3.P$9 SA3.P$10
SC1: JP2.2 SC1.P$2 SC1.P$3 SC1.P$7 SC1.P$8 SC1.P$9 SC1.P$10
SC2: SC2.P$2 SC2.P$3 SC2.P$4 SC2.P$5 SC2.P$7 SC2.P$8 SC2.P$9 SC2.P$10
SG1: SG1.P$1 SG1.P$4 SG1.P$5 SG1.P$6 SG1.P$7 SG1.P$8
SG4: SG4.P$1 SG4.P$4 SG4.P$5 SG4.P$6 SG4.P$7 SG4.P$8
SINK: LM1117.4
SWDCK: J6.21
SWDIO: J6.23
VBUS: ESD.P$5 PTC.P$1 X1.A4B9-VBUS X1.B4A9-VBUS
VCC: C1.1 C2.1 C3.1 D0.A J3.4 J6.2 J6.4 J6.74 LM1117.2
VIN/3: J6.49 R3.1 R4.2
VSUP: C4.1 C5.1 C7.1 C8.1 C9.1 C10.1 C11.1 D0.C J2.1 J4.3 J6.9 JP1.2 LED-5.1-VDD LED-6.1-VDD LED-7.1-VDD LED-8.1-VDD LED-CL.1-VDD LM1117.3 PTC.P$2 TVS.P$1 Y1.5